# EAGLE board Tom Casey (EAGLE 7.1.0)
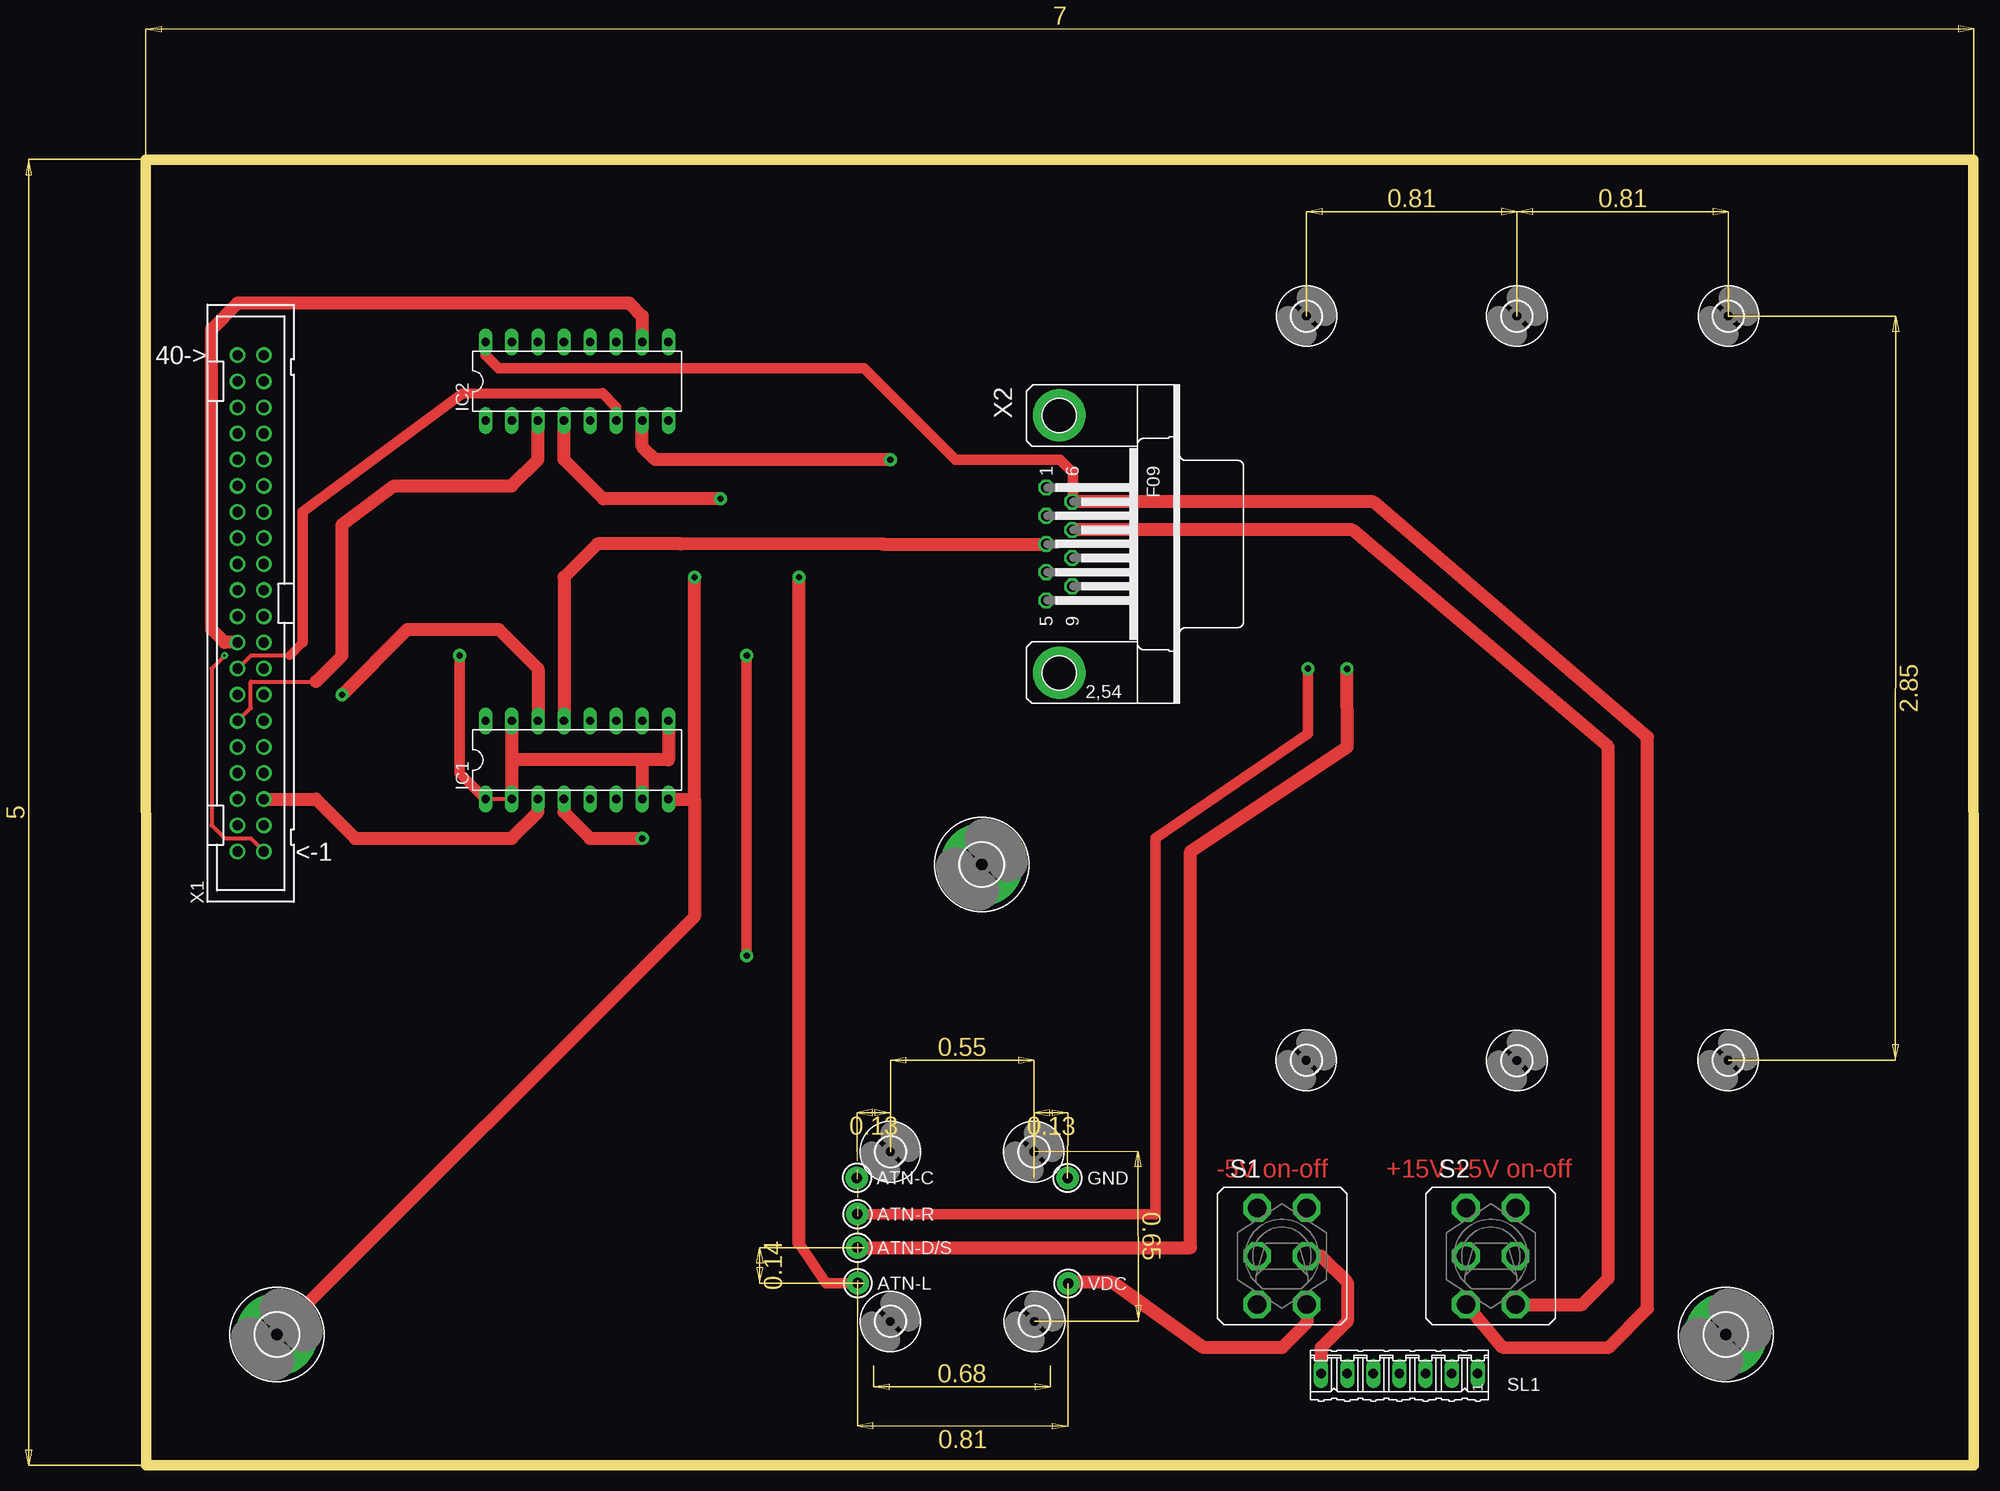
[diagram p0: board, top side]
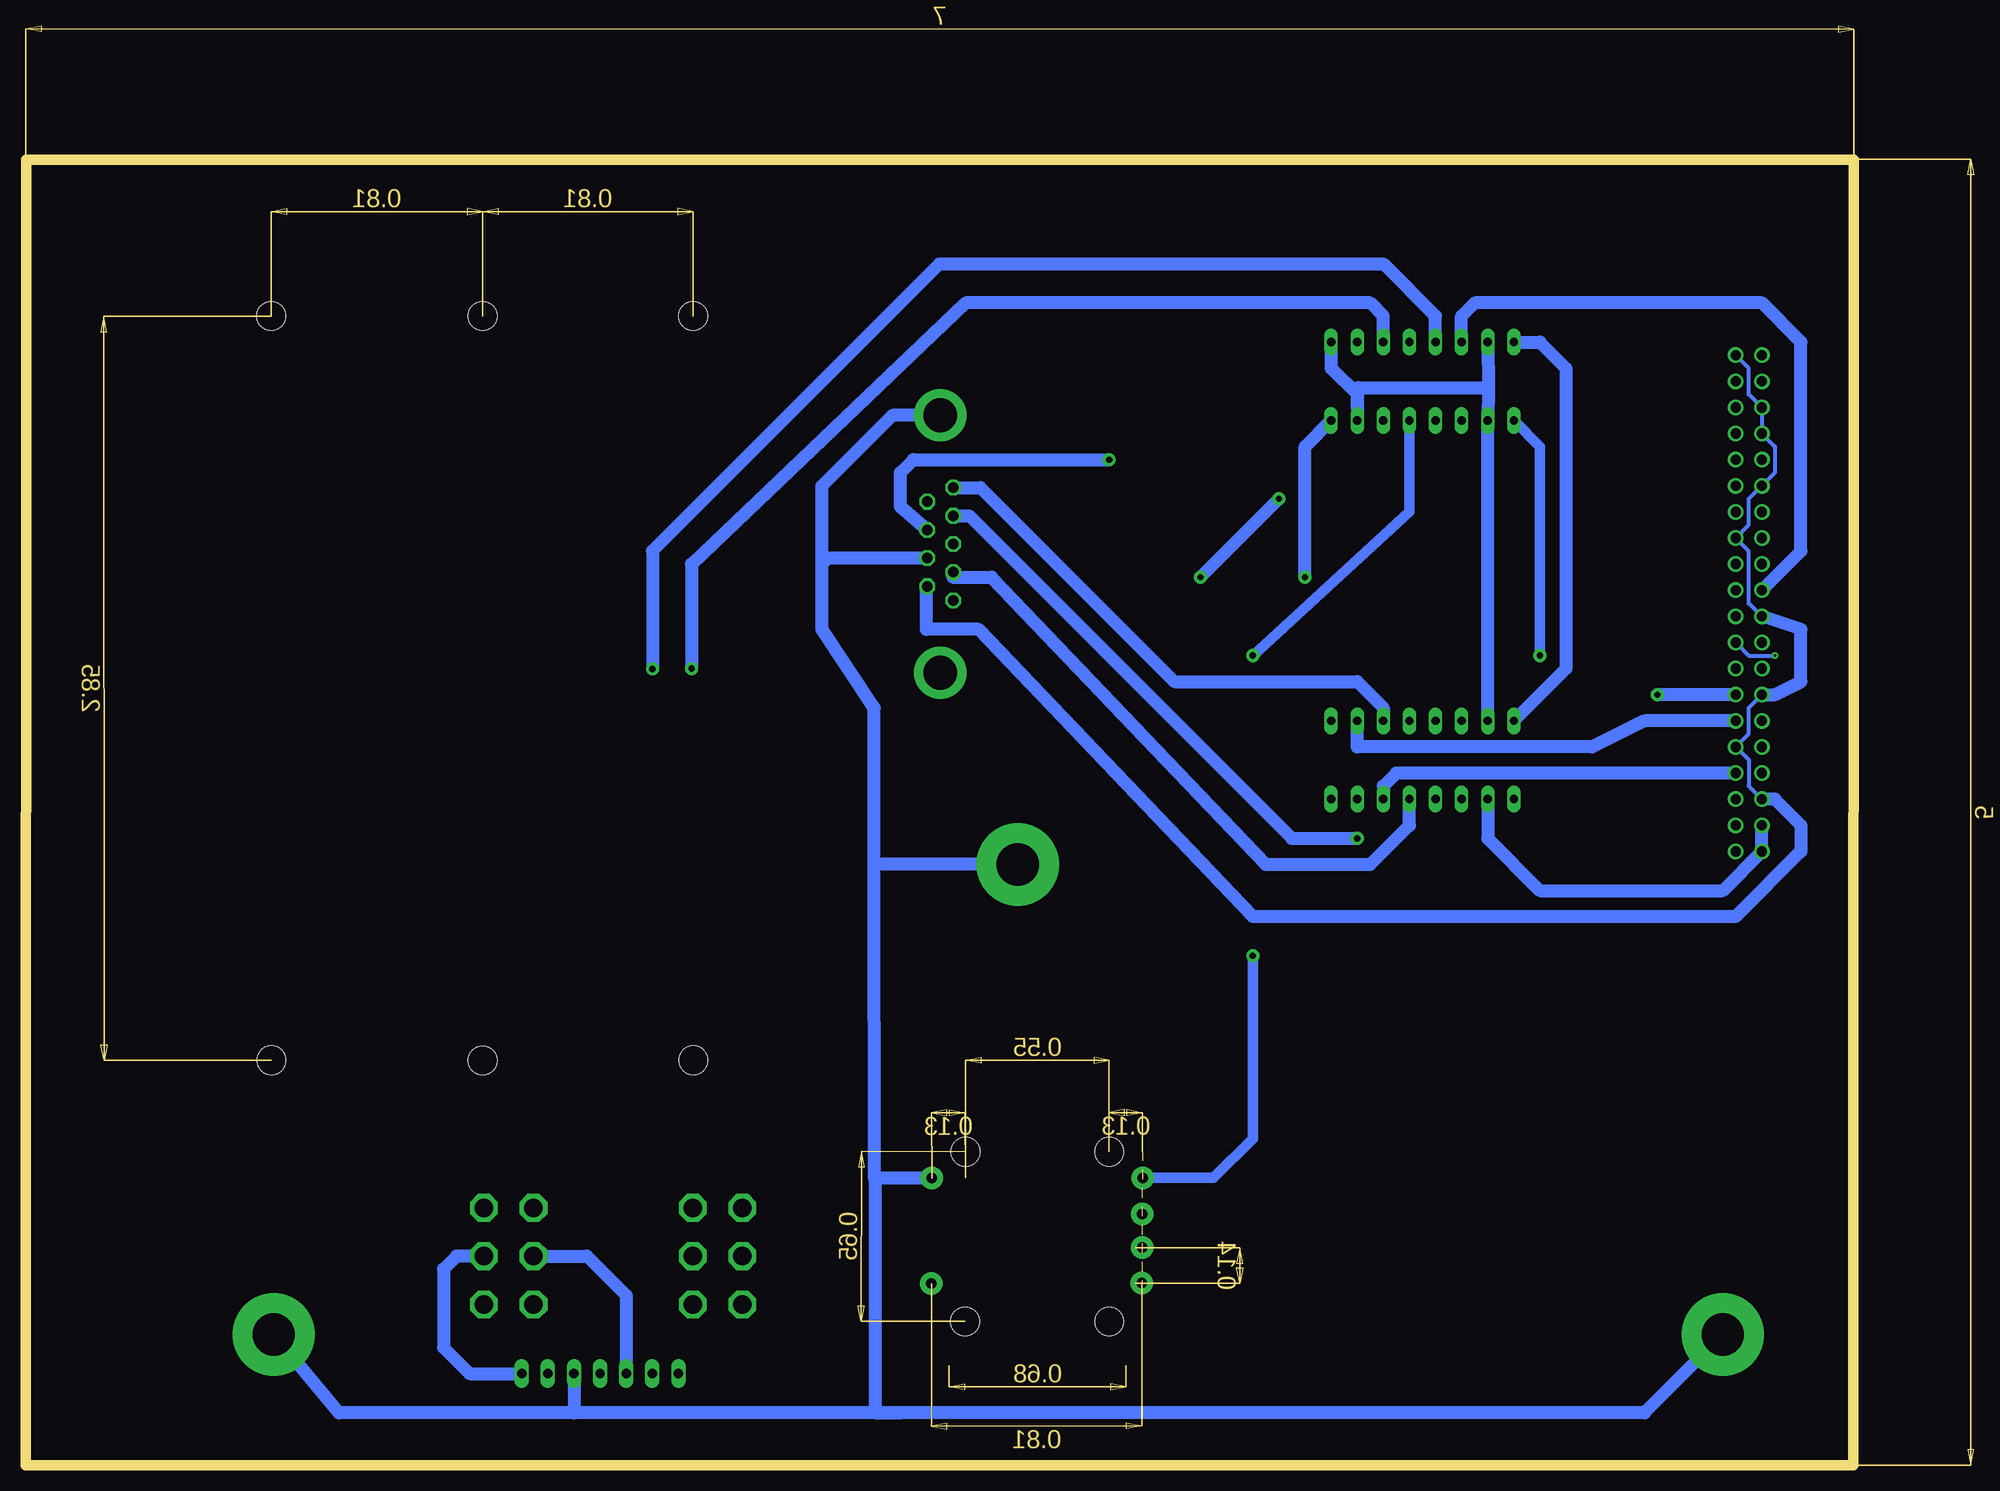
[diagram p1: board, bottom side, seen from below]

Size 0.05 x 15.04 mm. Coordinates in mm from the lower left corner, seen from the top.
Outline: 0,15.04 0.05,0
Copper layers (1*16): Top 2.5mil / dielectric 53mil / Bottom 2.5mil
Design rules "default *": minimum track width 20mil, minimum drill 10mil, track to track 20mil, track to pad 20mil, pad to pad 25mil, via to via 20mil, smd to smd 8mil, copper to edge 50mil, drill to drill 10mil, minimum pad ring 10mil, minimum via ring 8mil, stop-mask expansion 0mil, vias tented up to drill 0mil, thermal gap 10mil
Milling: 4 lines

## Footprints (pad centres in the part's own frame; a part is rotated, then mirrored left to right if it is on the bottom)
0400 = drill 1.016 pad 2.184: P$1 0,0
4,1-PAD = drill 4.1 pad 8: B4,1 0,0
2,8 = hole 2.8: 0,0
DIL16 = drill 0.813 long: 1 -8.89,-3.81; 2 -6.35,-3.81; 3 -3.81,-3.81; 4 -1.27,-3.81; 5 1.27,-3.81; 6 3.81,-3.81; 7 6.35,-3.81; 8 8.89,-3.81; 9 8.89,3.81; 10 6.35,3.81; 11 3.81,3.81; 12 1.27,3.81; 13 -1.27,3.81; 14 -3.81,3.81; 15 -6.35,3.81; 16 -8.89,3.81
M9040P2 = drill 1.803 octagon: 1 -2.413,4.699; 2 -2.413,0; 3 -2.413,-4.699; 4 2.413,4.699; 5 2.413,0; 6 2.413,-4.699
07P = drill 0.914 long: 1 -7.62,0; 2 -5.08,0; 3 -2.54,0; 4 0,0; 5 2.54,0; 6 5.08,0; 7 7.62,0
PAK100/2500-40 = drill 1 pad 1.422: 1 -24.13,-1.27; 2 -24.13,1.27; 3 -21.59,-1.27; 4 -21.59,1.27; 5 -19.05,-1.27; 6 -19.05,1.27; 7 -16.51,-1.27; 8 -16.51,1.27; 9 -13.97,-1.27; 10 -13.97,1.27; 11 -11.43,-1.27; 12 -11.43,1.27; 13 -8.89,-1.27; 14 -8.89,1.27; 15 -6.35,-1.27; 16 -6.35,1.27; 17 -3.81,-1.27; 18 -3.81,1.27; 19 -1.27,-1.27; 20 -1.27,1.27; 21 1.27,-1.27; 22 1.27,1.27; 23 3.81,-1.27; 24 3.81,1.27; 25 6.35,-1.27; 26 6.35,1.27; 27 8.89,-1.27; 28 8.89,1.27; 29 11.43,-1.27; 30 11.43,1.27; 31 13.97,-1.27; 32 13.97,1.27; 33 16.51,-1.27; 34 16.51,1.27; 35 19.05,-1.27; 36 19.05,1.27; 37 21.59,-1.27; 38 21.59,1.27; 39 24.13,-1.27; 40 24.13,1.27
F09HP = drill 1.016 octagon: 1 -5.486,-1.27; 2 -2.743,-1.27; 3 0,-1.27; 4 2.743,-1.27; 5 5.486,-1.27; 6 -4.115,1.27; 7 -1.372,1.27; 8 1.372,1.27; 9 4.115,1.27 | drill 3.302 pad 5.08: G1 -12.522,0; G2 12.522,0

## Placement (x,y rotation side)
ATN-C  PAD-0400  [0400]  -0.03,12.4 0 top
ATN-D/S  PAD-0400  [0400]  0.03,5.6 0 top
ATN-L  PAD-0400  [0400]  0.05,2.15 0 top
ATN-R  PAD-0400  [0400]  0.03,8.86 0 top
GND  PAD-0400  [0400]  20.47,12.37 0 top  (outside the outline)
H1  MOUNT-PAD-ROUND4.1  [4,1-PAD]  -56.46,-2.84 0 top  (outside the outline)
H2  MOUNT-PAD-ROUND4.1  [4,1-PAD]  84.51,-2.84 0 top  (outside the outline)
H3  MOUNT-HOLE2.8  [2,8]  3.23,14.94 0 top  (outside the outline)
H4  MOUNT-HOLE2.8  [2,8]  3.23,-1.57 0 top  (outside the outline)
H5  MOUNT-HOLE2.8  [2,8]  17.2,14.94 0 top  (outside the outline)
H6  MOUNT-HOLE2.8  [2,8]  17.25,-1.57 0 top  (outside the outline)
H7  MOUNT-HOLE2.8  [2,8]  43.71,96.22 0 top  (outside the outline)
H8  MOUNT-HOLE2.8  [2,8]  64.19,96.22 0 top  (outside the outline)
H9  MOUNT-HOLE2.8  [2,8]  84.76,96.22 0 top  (outside the outline)
H10  MOUNT-HOLE2.8  [2,8]  43.69,23.83 0 top  (outside the outline)
H11  MOUNT-HOLE2.8  [2,8]  64.19,23.8 0 top  (outside the outline)
H12  MOUNT-HOLE2.8  [2,8]  84.73,23.83 0 top  (outside the outline)
H13  MOUNT-PAD-ROUND4.1  [4,1-PAD]  12.12,42.88 0 top  (outside the outline)
IC1  40109  [DIL16]  -27.25,53.04 0 top  (outside the outline)
IC2  40109  [DIL16]  -27.25,89.87 0 top  (outside the outline)
S1  [M9040P2]  41.33,4.78 0 top  (outside the outline)
S2  [M9040P2]  61.65,4.78 0 top  (outside the outline)
SL1  POWER  [07P]  52.76,-6.65 180 top  (outside the outline)
VDC  PAD-0400  [0400]  20.52,2.11 0 top  (outside the outline)
X1  2540-  [PAK100/2500-40]  -59,68.28 90 top  (outside the outline)
X2  [F09HP]  19.66,74.04 270 top  (outside the outline)

## Library data of the parts
ATN-C ATN-D/S ATN-L ATN-R GND VDC = dpads
H1-H13 = holes
IC1 IC2 = 40xx-2
S1 S2 = switch
SL1 = con-amp-quick; OC_FARNELL: unknown; OC_NEWARK: unknown
X1 = con-3m; OC_FARNELL: unknown; OC_NEWARK: unknown
X2 = con-subd; OC_FARNELL: unknown; OC_NEWARK: unknown

## Nets
+3.3V: X1.1 X1.17
+5: S2.5 SL1.1
+15: S2.2 SL1.5
-5V: S1.5 SL1.7
CLOCK: IC1.11 X2.1
DATA: IC1.4 X2.2
DGND: X1.6 X1.9 X1.14 X1.20 X1.25 X1.30 X1.34 X1.39 X2.9
ENABLE: IC1.13 X2.3
GPIO-2: X1.3
GPIO-3: IC1.3 X1.5
GPIO-4: IC1.6 X1.7
GPIO-5: X1.29
GPIO-6: X1.31
GPIO-7: X1.26
GPIO-8: X1.24
GPIO-9: X1.21
GPIO-10: X1.19
GPIO-11: X1.23
GPIO-12: X1.32
GPIO-13: X1.33
GPIO-14: X1.8
GPIO-15: X1.10
GPIO-16: X1.36
GPIO-17: IC1.10 X1.11
GPIO-18: IC2.3 X1.12
GPIO-19: X1.35
GPIO-20: X1.38
GPIO-21: X1.40
GPIO-22: X1.15
GPIO-23: IC2.6 X1.16
GPIO-24: IC2.10 X1.18
GPIO-25: IC2.14 X1.22
GPIO-26: X1.37
GPIO-27: IC1.14 X1.13
ID_SC: X1.28
ID_SD: X1.27
LOCK_ALARM: IC1.5 X2.4
N$9: ATN-L.P$1 IC2.4
N$10: ATN-C.P$1 IC2.5
N$11: ATN-R.P$1 IC2.11
N$12: ATN-D/S.P$1 IC2.13
N$14: S1.6 VDC.P$1
N/C: X2.5
VCC: IC1.1 IC1.2 IC1.7 IC1.9 IC1.15 IC2.1 IC2.2 IC2.7 IC2.9 IC2.15 S2.6 X1.2 X1.4 X2.7
VDD: IC1.16 IC2.16 S2.3 X2.6
VSS: GND.P$1 H1.B4,1 H2.B4,1 H13.B4,1 IC1.8 IC2.8 SL1.3 X2.8 X2.G1

## Tracks (layer width: path | path; a pad name or v marks a point on that pad's centre or on a via)
+3.3V  (via drill 0.25)
  Top 0.381: X1.1 -59,45.42 -61.54,45.42 -62.81,46.69 -62.81,61.93 v-61.54,63.2
  Bottom 0.381: v-61.54,63.2 -59,63.2 X1.17
+5
  Bottom 1.27: S2.5 66.73,4.78 68,3.51 68,-4.11 65.46,-6.65 SL1.1
+15
  Bottom 1.27: S2.2 54.03,4.78 50.22,0.97 SL1.5
-5V
  Top 1.27: S1.5 45.14,4.78 47.68,2.24 47.68,-1.57 45.14,-4.11 SL1.7
CLOCK
  Bottom 1.27: X2.1 15.75,79.53 -3.12,60.66 -20.9,60.66 -23.44,58.12 IC1.11
DATA  (via drill 0.64 pad 1.27)
  Top 1.27: IC1.4 -28.52,47.96 -25.98,45.42 v-20.9,45.42
  Bottom 1.27: X2.2 16.81,76.78 -14.55,45.42 v-20.9,45.42
DGND
  Bottom 0.406: X1.14 -59,58.12 -59,55.58 X1.9 -59,53.04 -59,50.5 X1.6 | X1.20 -59,68.28 -59,73.36 X1.25 -59,75.9 -59,78.44 X1.30 -61.54,80.98 -61.54,83.52 X1.34 -60.27,87.33 -59,88.6 -59,91.14 X1.39
  Bottom 0.635: 21.01,69.55 X2.9
  Bottom 1.27: X1.14 -61.54,59.39 -64.08,60.66 -64.08,65.74 X1.20 | 21.01,69.55 21.01,65.74 15.93,65.74 -10.74,37.8 -57.73,37.8 -64.08,44.15 -64.08,46.69 -61.54,49.23 X1.6
ENABLE
  Top 1.27: IC1.13 -28.52,70.82 -25.27,74.07 -17.15,74.07 2.59,74.02 2.62,74.04 X2.3 18.36,74.02
GPIO-3
  Top 1.27: X1.5 -52.65,49.23 -48.84,45.42 -33.6,45.42 -31.06,47.96 IC1.3
GPIO-4
  Bottom 1.27: X1.7 -24.71,51.77 -23.44,50.5 IC1.6
GPIO-17
  Bottom 1.27: X1.11 -48.84,56.85 -43.76,54.31 -20.9,54.31 IC1.10
GPIO-18
  Top 0.406: X1.12 -59,58.12 -59,60.66 -52.65,60.66
  Top 1.27: -52.65,60.66 -50.11,63.2 -50.11,75.9 -45.03,79.71 -33.6,79.71 -31.06,82.25 IC2.3
GPIO-23
  Top 0.406: -55.19,63.2 -59,63.2 X1.16
  Top 0.813: -53.92,64.47 -55.19,63.2
  Top 1.016: IC2.6 -23.44,87.33 -24.79,88.7 -38.46,88.67 -53.92,77.17 -53.92,64.47
GPIO-24
  Top 1.27: X1.18 -61.54,64.47 -62.81,65.74 -62.81,94.95 -60.27,97.49 -22.17,97.49 -20.9,96.22 IC2.10
GPIO-25
  Bottom 1.27: IC2.14 -31.06,96.22 -32.33,97.49 -60.27,97.49 -64.08,93.68 -64.08,73.36 X1.22
GPIO-27  (via drill 0.6 pad 1.27)
  Top 1.27: v-50.11,59.39 -43.76,65.74 -34.87,65.74 -31.06,61.93 IC1.14
  Bottom 1.27: X1.13 v-50.11,59.39
LOCK_ALARM
  Bottom 1.27: IC1.5 -25.98,46.69 -22.17,42.88 -12.01,42.88 14.66,70.82 18.47,70.82 X2.4
N$9  (via drill 0.6 pad 1.27)
  Top 1: ATN-L.P$1 -3.04,2.15 -5.66,6.05
  Top 1.27: -5.66,6.05 v-5.66,70.82 | v-13.28,78.44 -24.71,78.44 -28.52,82.25 IC2.4
  Bottom 1.27: v-5.66,70.82 v-13.28,78.44
N$10  (via drill 0.6 pad 1.27)
  Top 1: v-10.74,63.2 v-10.74,33.99
  Bottom 1: IC2.5 -25.98,77.17 v-10.74,63.2 | v-10.74,33.99 -10.74,16.21 -6.93,12.4 ATN-C.P$1
N$11  (via drill 0.6 pad 1.27)
  Top 1.016: v43.87,61.93 43.87,55.58 29.01,45.42 29.01,8.86 ATN-R.P$1
  Bottom 1.27: IC2.11 -23.44,96.22 -22.17,97.49 17.2,97.49 43.87,72.09 v43.87,61.93
N$12  (via drill 0.64 pad 1.27)  (1 unrouted)
  Top 1.27: 0.01,5.6 32.44,5.6 32.44,44.15 47.68,54.31 v47.65,61.9
  Bottom 1.27: IC2.13 -28.52,96.22 -23.44,101.3 19.74,101.3 47.65,73.38 v47.65,61.9
N$14
  Top 1.27: S1.6 43.74,-1.7 41.33,-4.11 33.71,-4.11 24.82,2.24 20.65,2.24 VDC.P$1
VCC  (via drill 0.6 pad 1.27)
  Top 0.381: IC1.2 IC1.1
  Top 1: IC1.1 -38.68,51.77 v-38.68,63.2
  Top 1.27: IC1.15 -33.6,53.04 | -33.6,53.04 IC1.2 | -20.9,53.04 IC1.7 | -20.9,53.04 -18.36,53.04 IC1.9 | -20.9,53.04 -33.6,53.04 | v3.23,82.25 -19.63,82.25 -20.9,83.52 IC2.7 | S2.6 64.08,0.05 70.51,0.05 73.08,2.62 73.08,54.31 48.16,75.41 X2.7
  Bottom 1: v-38.68,63.2 -38.68,83.52 IC2.1
  Bottom 1.27: IC1.15 IC2.2 -33.68,89.26 | IC1.2 -33.6,45.42 -38.68,40.34 -56.46,40.34 X1.2 X1.4 | X2.7 23.55,77.67 23.55,80.98 22.28,82.25 v3.23,82.25 | -20.9,87.33 -20.98,89.26 -33.68,89.26 | IC2.9 -18.36,91.14 -20.9,88.6 -20.9,87.33 | -20.9,87.33 IC2.7 | IC2.15 -33.68,89.26
VDD
  Top 1: IC2.16 -36.14,92.41 -34.87,91.14 | 0.69,91.14 9.58,82.25 19.74,82.25 21.01,80.98 21.01,78.23 X2.6
  Top 1.016: -34.87,91.14 0.69,91.14
  Top 1.27: S2.3 62.74,-4.06 73.08,-4.11 76.89,-0.3 76.89,55.27 50.22,78.13 20.95,78.13 X2.6
  Bottom 1.27: IC2.16 -38.68,93.68 -41.22,91.14 -41.22,61.93 IC1.16
VSS  (via drill 0.6 pad 1.27)
  Top 1.27: IC1.8 -15.82,49.23 | -15.82,49.23 v-15.82,70.82 | -15.82,49.23 -15.82,37.8 H1.B4,1
  Bottom 1.27: 55.3,-10.46 78.16,-10.46 H2.B4,1 | SL1.3 55.3,-10.46 | H1.B4,1 -48.84,-10.46 23.55,-10.46 | 23.55,-10.46 55.3,-10.46 | 23.55,-10.46 26.01,-10.44 26.01,12.4 20.47,12.32 GND.P$1 26.06,12.37 26.03,12.34 26.09,42.88 | X2.G1 24.31,86.56 31.17,79.71 31.17,72.09 | 26.09,42.88 26.09,58.12 31.17,65.74 31.17,72.09 | X2.8 30.58,72.67 31.17,72.09 | H13.B4,1 26.09,42.88 | v-15.82,70.82 -15.82,83.52 IC2.8

## Text on the board
Top: -5V on-off | +15V +5V on-off
tNames: 40-> | <-1
Measures: YIG / MLSL-0811
Document: USE THIS LAYOUT
tDocu: +15 | GND | +5 | -5